# EAGLE board shield (EAGLE 5.11)
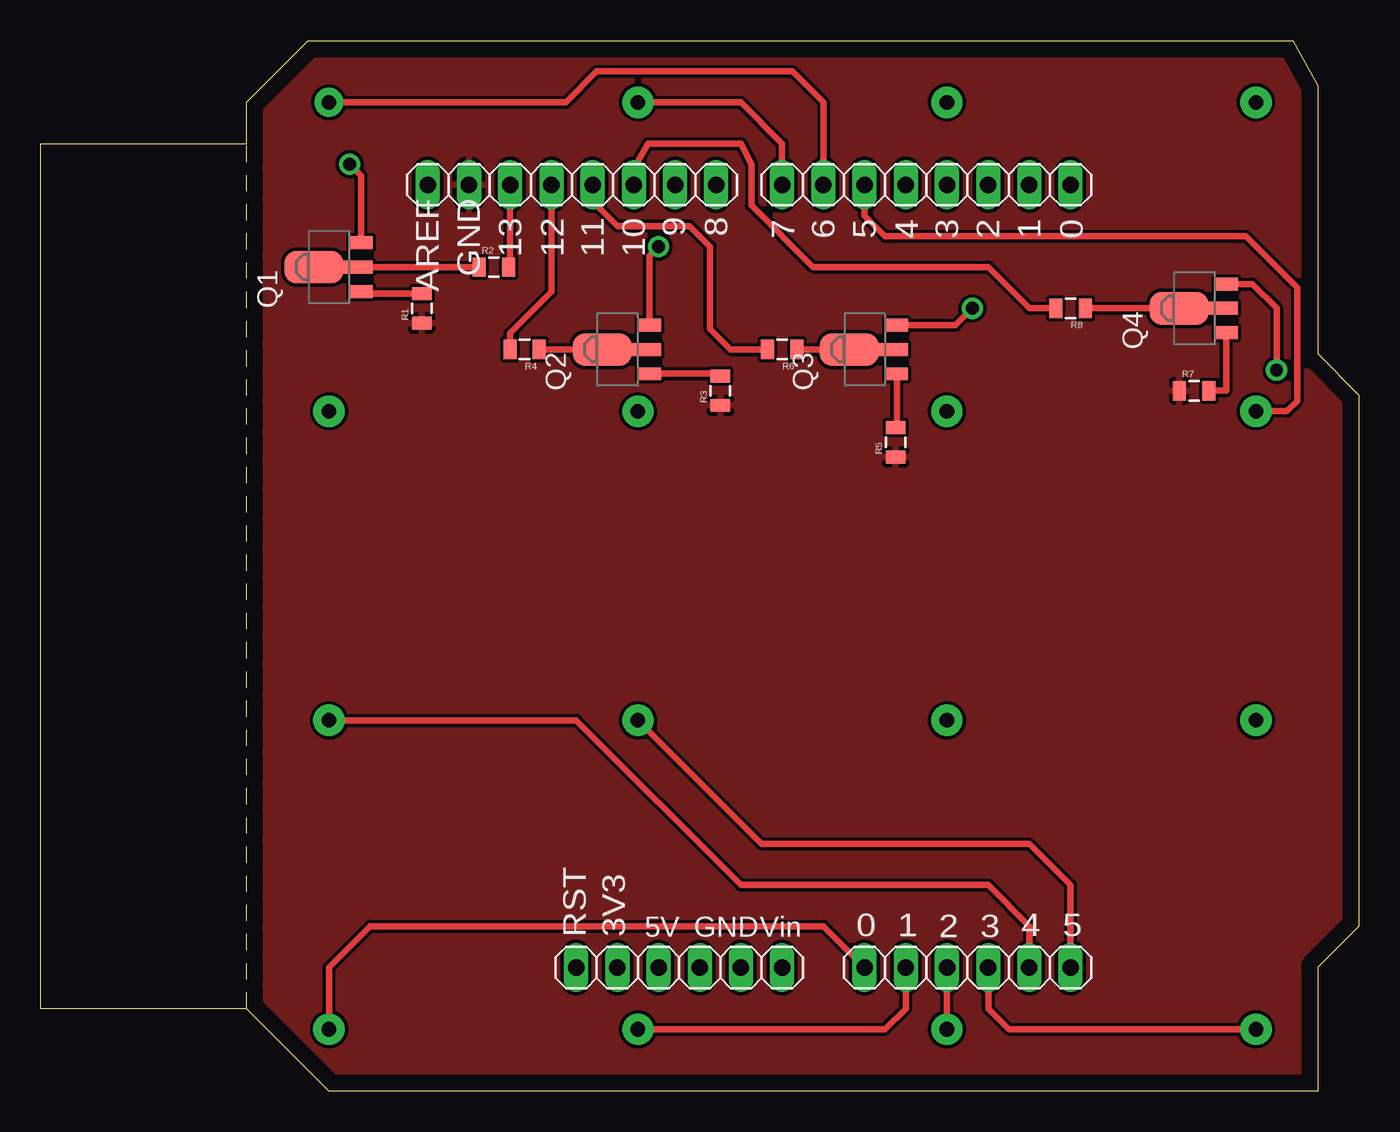
[diagram p0: board, top side]
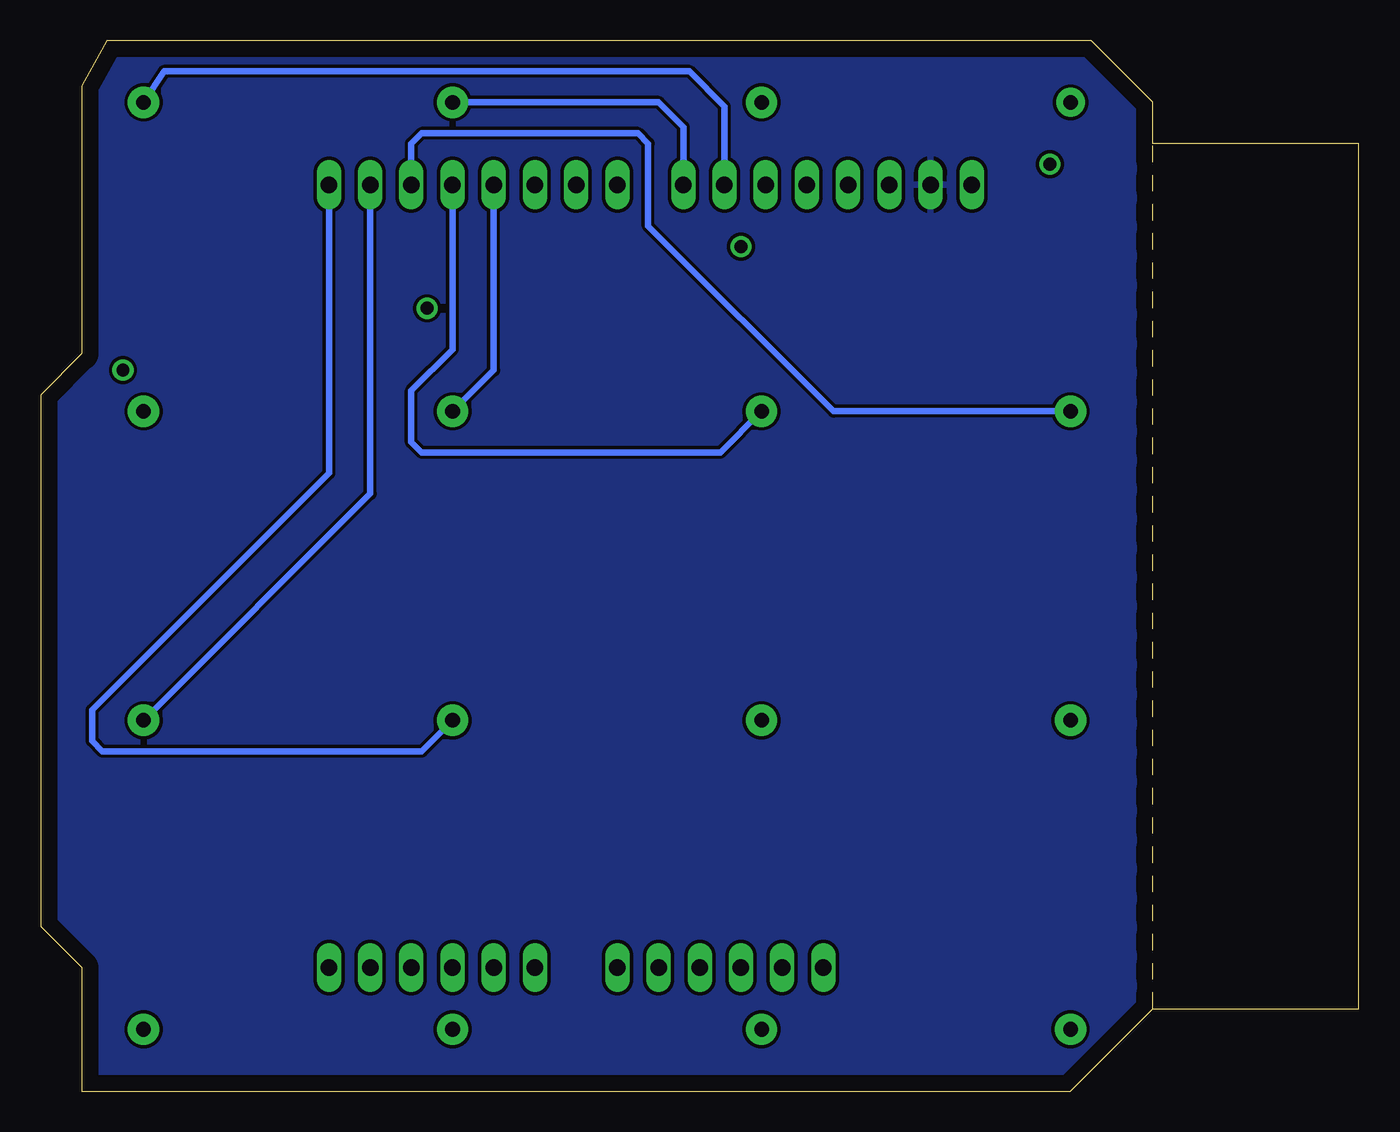
[diagram p1: board, bottom side, seen from below]

Size 81.28 x 64.77 mm. Coordinates in mm from the lower left corner, seen from the top.
Outline: 12.7,58.42 0,58.42 0,5.08 12.7,5.08
Outline: 12.7,58.42 12.7,60.96 16.51,64.77 77.22,64.77 78.74,61.98 78.74,45.47 81.28,42.93 81.28,10.16 78.74,7.62 78.74,0 17.78,0 12.7,5.08
Outline: 12.7,5.08 12.7,58.42
Copper layers (1*16): Top 0.035mm / dielectric 1.5mm / Bottom 0.035mm
Design rules "default": minimum track width 10mil, minimum drill 24mil, track to track 8mil, track to pad 8mil, pad to pad 8mil, via to via 8mil, smd to smd 8mil, copper to edge 40mil, drill to drill 8mil, minimum pad ring 10mil, minimum via ring 8mil, stop-mask expansion 4mil, vias tented up to drill 0mil, thermal gap 10mil

## Footprints (pad centres in the part's own frame; a part is rotated, then mirrored left to right if it is on the bottom)
SOT89 = smd 0.8 x 1.4: 1 -1.499,-1.981; 3 1.499,-1.981 | smd 0.8 x 1.9: 2 0,-1.727 | smd 2.032 x 3.65: 2@1 0,0.94
SPARKFUN_0805 = smd 0.8 x 1.2: 1 -0.9,0; 2 0.9,0
1X06 = drill 1.016 long: 1 -6.35,0; 2 -3.81,0; 3 -1.27,0; 4 1.27,0; 5 3.81,0; 6 6.35,0
1X08 = drill 1.016 long: 1 -8.89,0; 2 -6.35,0; 3 -3.81,0; 4 -1.27,0; 5 1.27,0; 6 3.81,0; 7 6.35,0; 8 8.89,0
LEDARRAY = drill 0.8 round: GND1 -26.67,24.13; GND2 -7.62,19.05; GND3 11.735,15.24; GND4 30.48,11.43 | drill 0.9 pad 1.93 round: R1C1 -27.94,-29.21; R1C2 -8.89,-29.21; R1C3 10.16,-29.21; R1C4 29.21,-29.21; R2C1 -27.94,-10.16; R2C2 -8.89,-10.16; R2C3 10.16,-10.16; R2C4 29.21,-10.16; R3C1 -27.94,8.89; R3C2 -8.89,8.89; R3C3 10.16,8.89; R3C4 29.21,8.89; R4C2 -8.89,27.94; R4C3 10.16,27.94; R4C4 29.21,27.94 | drill 0.9 pad 1.778 round: R4C1 -27.94,27.94

## Placement (x,y rotation side)
Q1  [SOT89]  17.78,50.8 90 top
Q2  [SOT89]  35.56,45.72 90 top
Q3  [SOT89]  50.8,45.72 90 top
Q4  [SOT89]  71.12,48.26 90 top
R1  [SPARKFUN_0805]  23.5,48.26 90 top
R2  [SPARKFUN_0805]  27.94,50.8 0 top
R3  [SPARKFUN_0805]  41.91,43.18 90 top
R4  [SPARKFUN_0805]  29.84,45.72 180 top
R5  [SPARKFUN_0805]  52.7,40 90 top
R6  [SPARKFUN_0805]  45.72,45.72 180 top
R7  [SPARKFUN_0805]  71.12,43.18 0 top
R8  [SPARKFUN_0805]  63.5,48.26 180 top
U$1  POWER  [1X06]  39.37,7.62 0 top
U$2  ANALOG  [1X06]  57.15,7.62 0 top
U$3  DIGITAL_0_7  [1X08]  54.61,55.88 0 top
U$4  DIGITAL_8_13  [1X08]  32.77,55.88 0 top
U$5  4X4_LEDGRID  [LEDARRAY]  45.72,33.02 0 top

## Library data of the parts
Q1-Q4 = semicon-smd-ipc
R1-R8 U$5 = NSL
U$1-U$4 = arduino

## Nets
0: R2.2 U$4.3
1: R4.2 U$4.4
2: R6.2 U$4.5
3: R8.2 U$4.6
GND: R1.1 R3.1 R5.1 R7.1 U$4.2
GND1: Q1.3 U$5.GND1
GND2: Q2.3 U$5.GND2
GND3: Q3.3 U$5.GND3
GND4: Q4.3 U$5.GND4
N$1: Q1.1 R1.2
N$2: Q1.2 R2.1
N$3: Q2.1 R3.2
N$4: Q2.2 R4.1
N$5: Q3.1 R5.2
N$6: Q4.1 R7.2
N$7: Q4.2 R8.1
N$8: Q3.2 R6.1
N$42: U$4.1
N$49: U$1.6
N$50: U$1.5
N$51: U$1.4
N$52: U$1.3
N$53: U$1.2
N$54: U$1.1
R1C1: U$2.1 U$5.R1C1
R1C2: U$2.2 U$5.R1C2
R1C3: U$2.3 U$5.R1C3
R1C4: U$2.4 U$5.R1C4
R2C1: U$2.5 U$5.R2C1
R2C2: U$2.6 U$5.R2C2
R2C3: U$3.8 U$5.R2C3
R2C4: U$3.7 U$5.R2C4
R3C1: U$3.6 U$5.R3C1
R3C2: U$3.5 U$5.R3C2
R3C3: U$3.4 U$5.R3C3
R3C4: U$3.3 U$5.R3C4
R4C1: U$3.2 U$5.R4C1
R4C2: U$3.1 U$5.R4C2
R4C3: U$4.8 U$5.R4C3
R4C4: U$4.7 U$5.R4C4

## Tracks (layer width: path | path; a pad name or v marks a point on that pad's centre or on a via)
0
  Top 0.406: R2.2 28.96,50.92 U$4.3
1
  Top 0.406: R4.2 28.95,46.73 31.5,49.28 U$4.4
2
  Top 0.406: U$4.5 34.04,54.86 35.56,53.34 40.01,53.34 41.27,52.07 41.27,46.99 42.55,45.72 R6.2
3
  Top 0.406: R8.2 60.96,48.26 58.42,50.8 47.62,50.8 43.81,54.61 43.81,57.15 43.18,58.42 37.47,58.42 36.58,56.9 U$4.6
GND
  pour Top: 0,58.42 0,5.08 12.7,5.08 17.78,0 78.74,0 78.74,7.62 81.28,10.16 81.28,43.18 78.74,45.72 78.74,62.23 77.47,64.77 16.51,64.77 12.7,60.96 12.7,58.42
  pour Bottom: 0,58.42 0,5.08 12.7,5.08 17.78,0 78.74,0 78.74,7.62 81.28,10.16 81.28,43.18 78.74,45.72 78.74,62.23 77.47,64.77 16.51,64.77 12.7,60.96 12.7,58.42
GND1
  Top 0.406: U$5.GND1 19.76,56.44 Q1.3
GND2
  Top 0.406: Q2.3 37.54,51.51 U$5.GND2
GND3
  Top 0.406: Q3.3 56.41,47.22 U$5.GND3
GND4
  Top 0.406: Q4.3 74.7,49.76 76.2,48.26 U$5.GND4
N$1
  Top 0.406: Q1.1 19.9,49.16 R1.2
N$2
  Top 0.406: Q1.2 R2.1
N$3
  Top 0.406: Q2.1 41.77,44.22 R3.2
N$4
  Top 0.406: R4.1 Q2.2
N$5
  Top 0.406: Q3.1 52.78,40.98 R5.2
N$6
  Top 0.406: Q4.1 73.1,43.18 R7.2
N$7
  Top 0.406: R8.1 Q4.2
N$8
  Top 0.406: R6.1 Q3.2
R1C1
  Top 0.406: U$2.1 48.26,10.16 20.32,10.16 17.78,7.62 U$5.R1C1
R1C2
  Top 0.406: U$5.R1C2 52.07,3.81 53.34,5.08 U$2.2
R1C3
  Top 0.406: U$5.R1C3 U$2.3
R1C4
  Top 0.406: U$5.R1C4 59.69,3.81 58.42,5.08 U$2.4
R2C1
  Top 0.406: U$5.R2C1 33.02,22.86 43.18,12.7 58.42,12.7 60.96,10.16 U$2.5
R2C2
  Top 0.406: U$5.R2C2 44.45,15.24 60.96,15.24 63.5,12.7 U$2.6
R2C3
  Bottom 0.406: U$3.8 63.5,38.1 78.11,23.49 78.11,21.59 77.47,20.95 57.78,20.95 U$5.R2C3
R2C4
  Bottom 0.406: U$5.R2C4 60.96,36.83 U$3.7
R3C1
  Bottom 0.406: U$5.R3C1 32.38,41.91 43.81,53.34 43.81,58.42 44.45,59.05 57.78,59.05 58.42,58.42 U$3.6
R3C2
  Bottom 0.406: U$3.5 55.88,45.72 58.42,43.18 58.42,40 57.78,39.37 39.37,39.37 U$5.R3C2
R3C3
  Bottom 0.406: U$5.R3C3 53.34,44.45 U$3.4
R3C4
  Top 0.406: U$3.3 50.8,53.98 52.07,52.7 74.3,52.7 77.47,49.53 77.47,42.55 76.83,41.91 U$5.R3C4
R4C1
  Top 0.406: U$5.R4C1 32.38,60.96 34.29,62.86 46.35,62.86 48.26,60.96 U$3.2
R4C2
  Top 0.406: U$5.R4C2 43.18,60.96 45.72,58.42 U$3.1
R4C3
  Bottom 0.406: U$4.8 41.66,59.44 43.18,60.96 U$5.R4C3
R4C4
  Bottom 0.406: U$5.R4C4 73.66,62.86 41.27,62.86 39.12,60.71 U$4.7

## Text on the board
tNames: 9 | 8 | 7 | 6 | 5 | 4 | 3 | 2 | 1 | 0 | 13 | 12 | 11 | 10 | GND | AREF | RST | 3V3 | 5V | GND | Vin | 0 | 1 | 2 | 3 | 4 | 5